# Altium PCB ScanQR_ESP32_pcb.PcbDoc
Units mil, origin at the board's own origin, x right, y up, seen from the top; angles counter-clockwise.
Board outline 2015 x 2315 mil, 2 copper layers (Top Layer, Bottom Layer); 14 components, 14 nets, 45 pads, 0 vias.
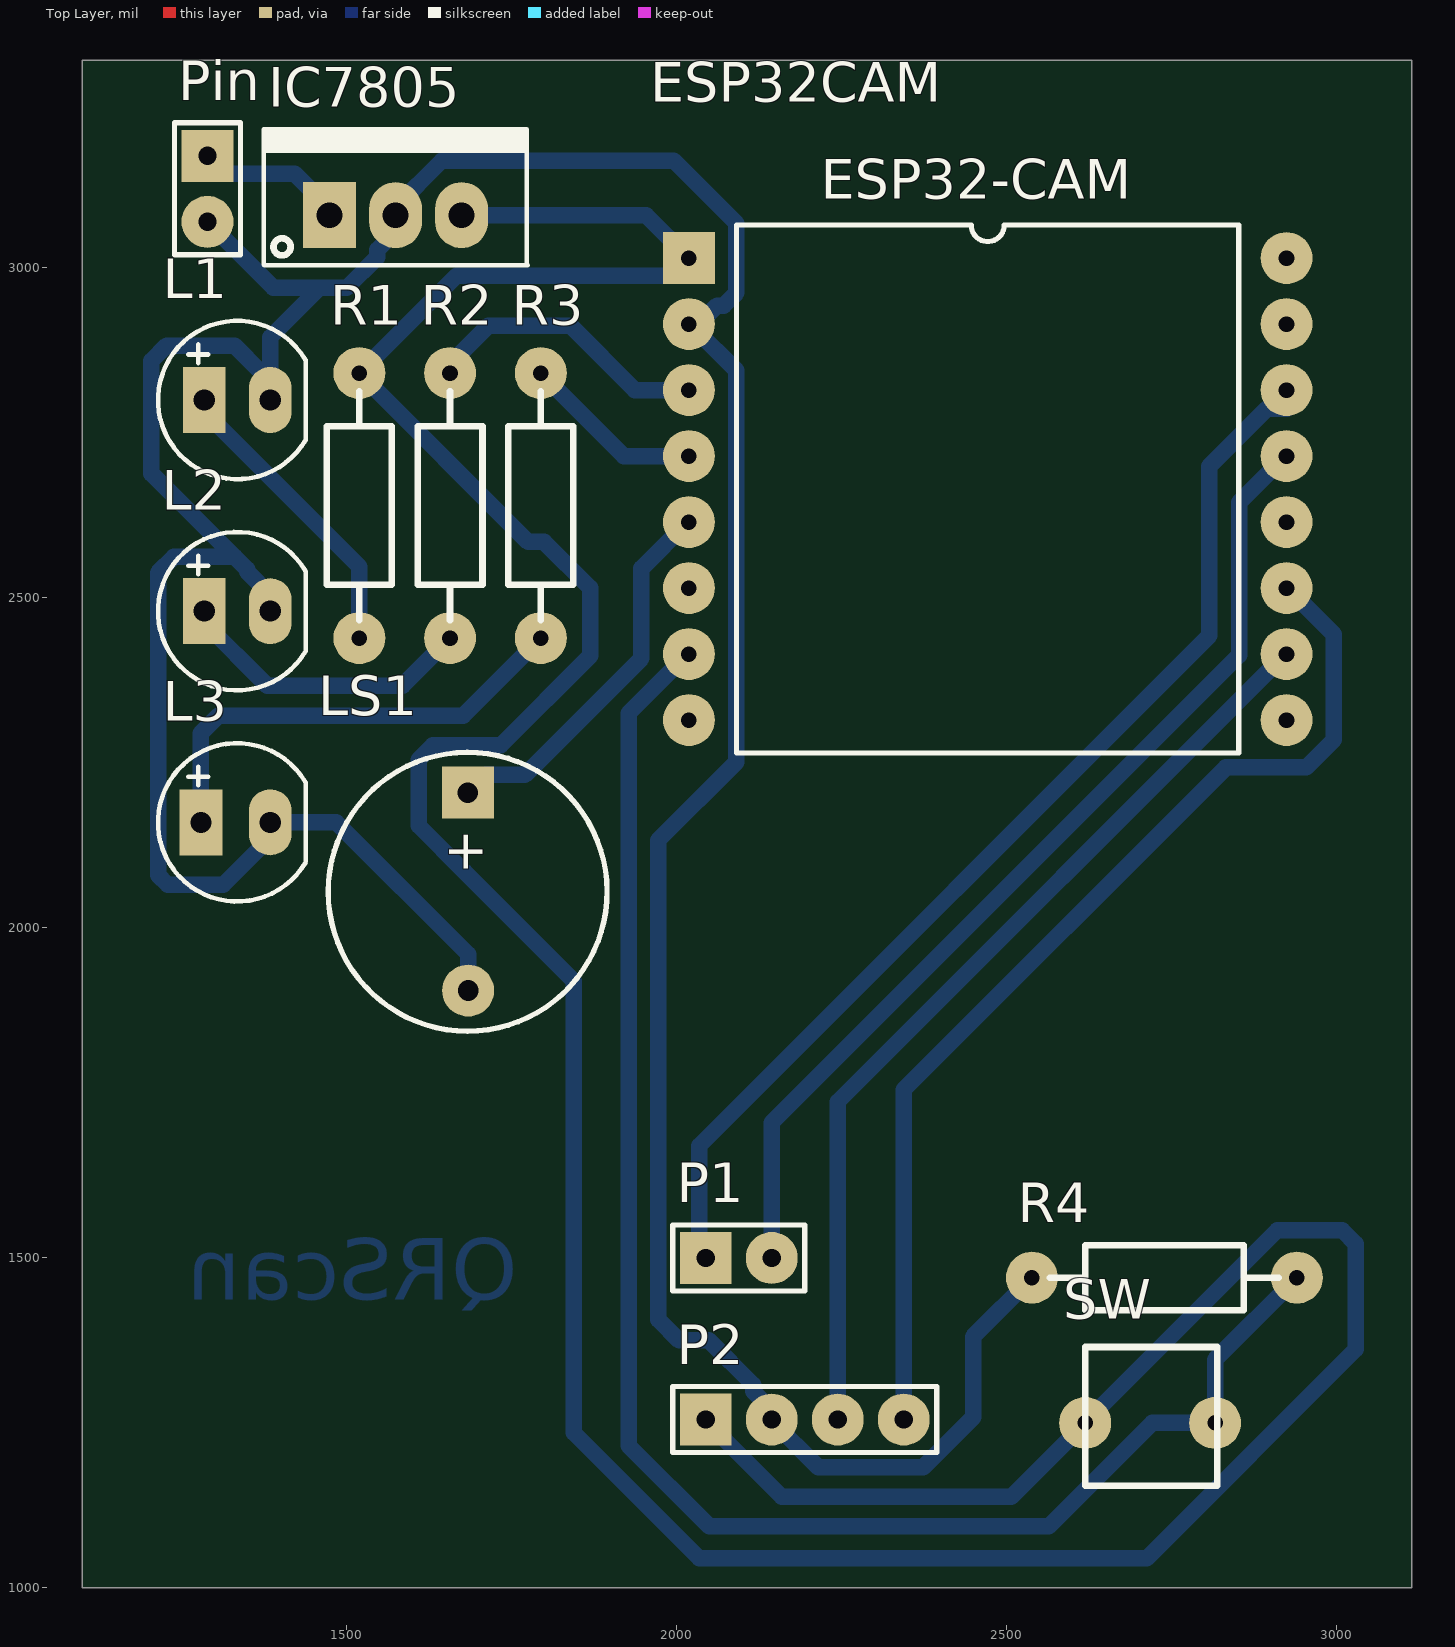
[diagram p0: Top Layer view]
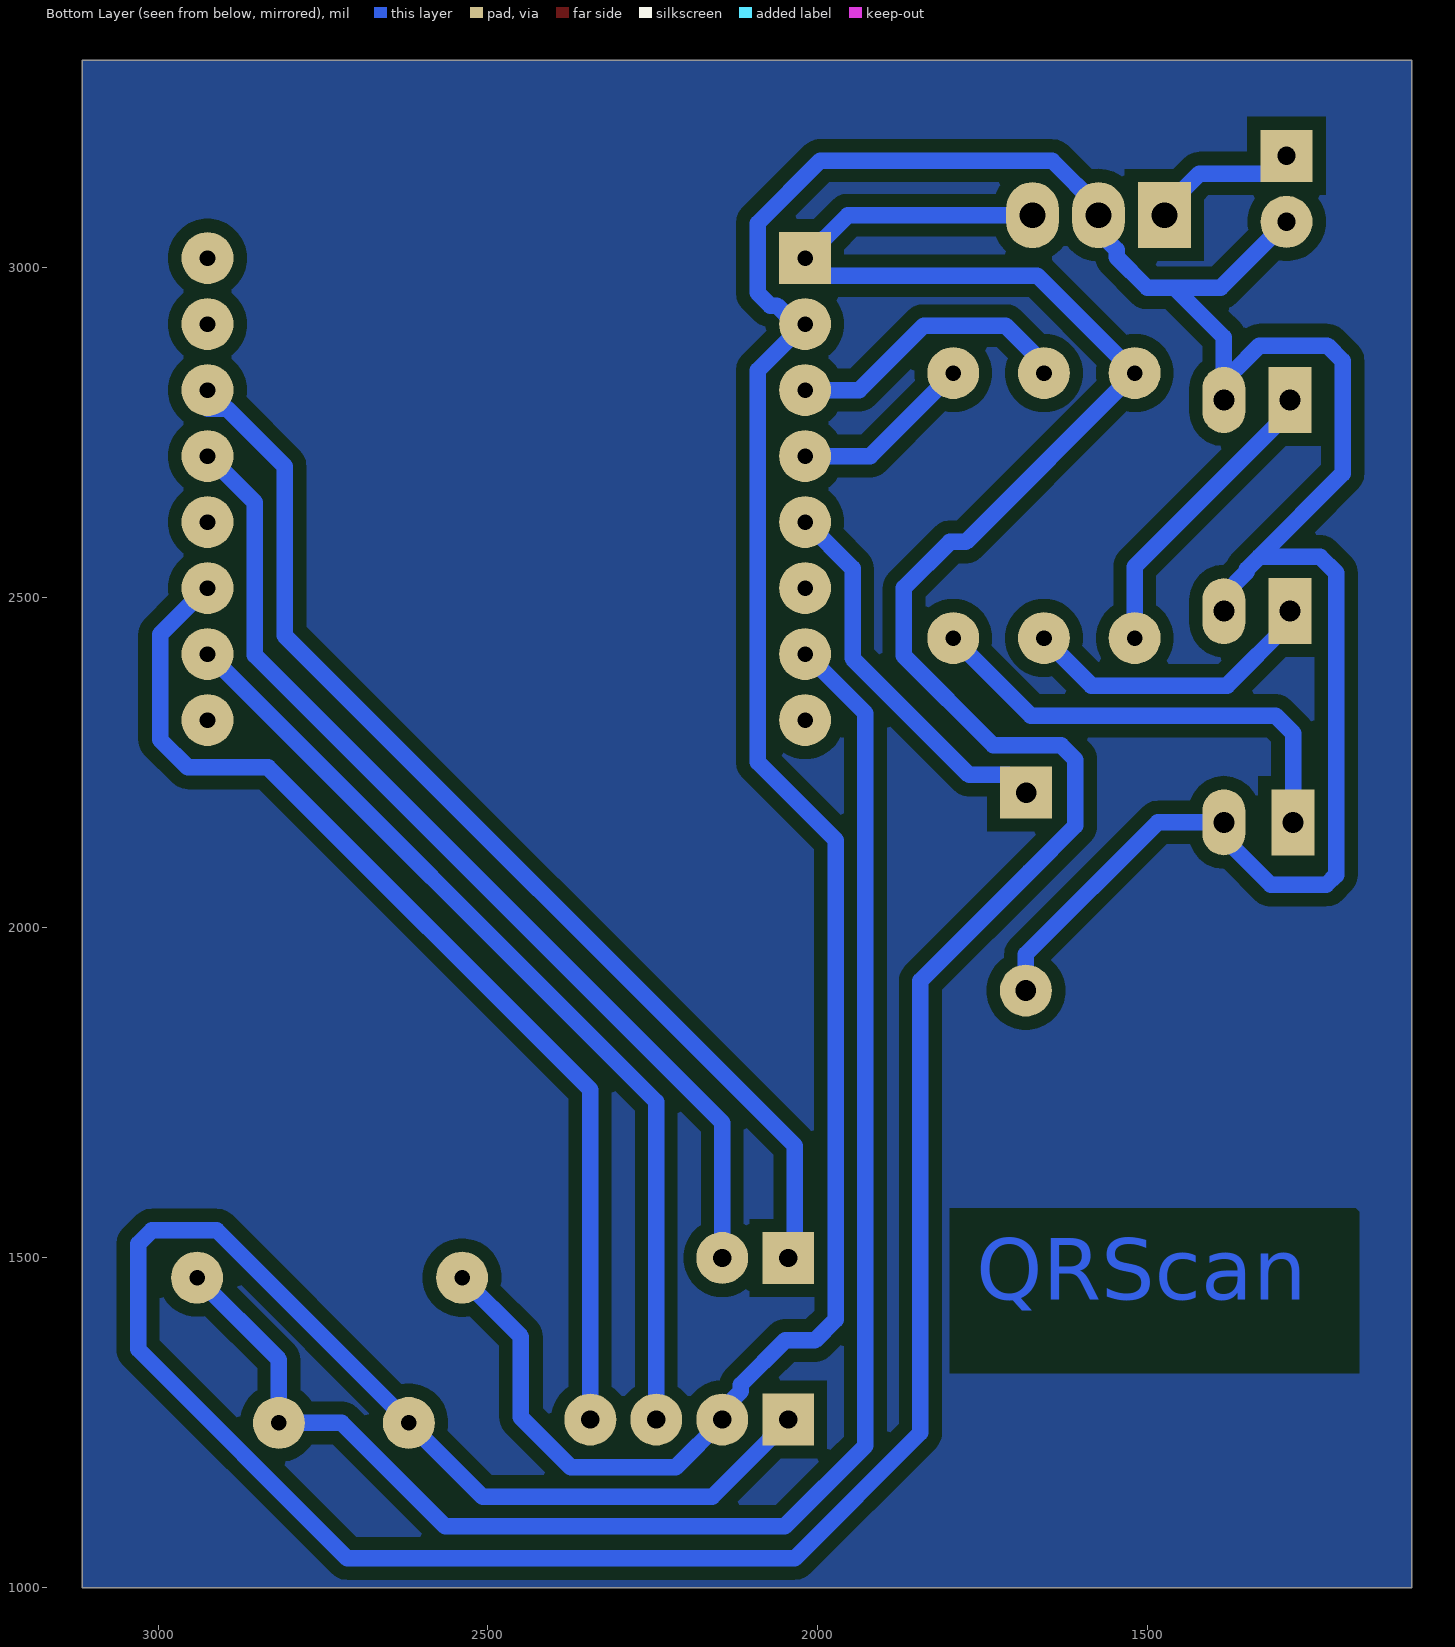
[diagram p1: Bottom Layer view, seen from below]
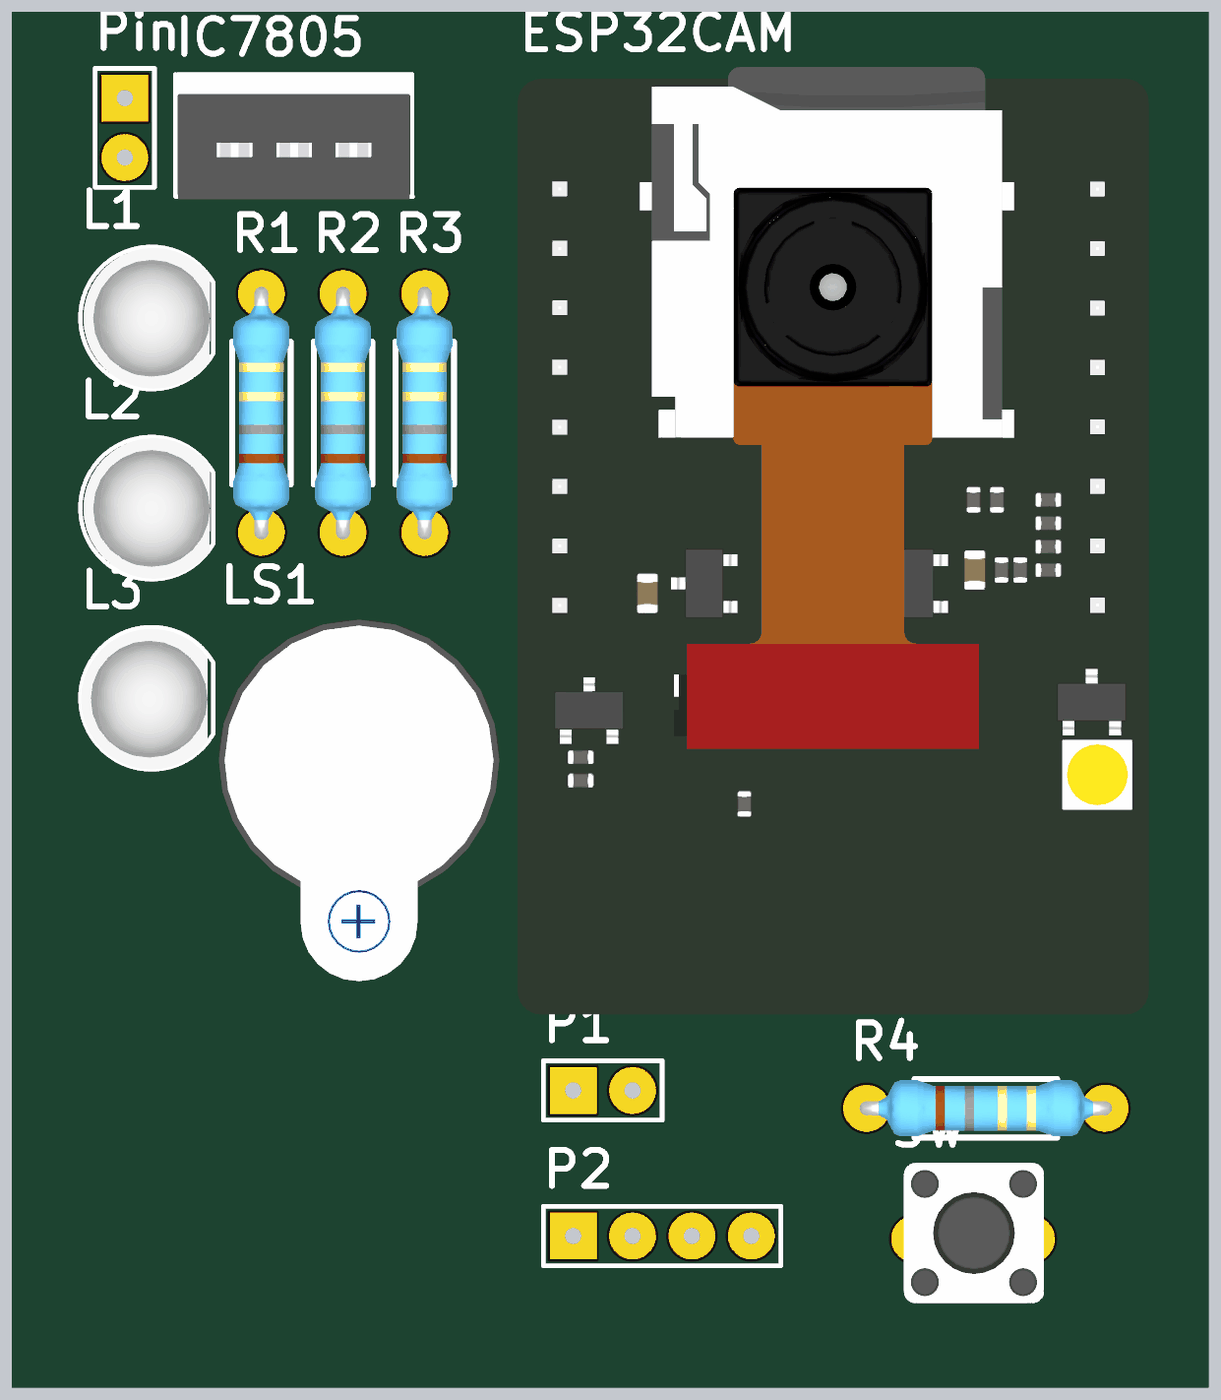
[diagram p2: 3D render of the assembled board from above, using the file's embedded part models]

## Layer stack, top to bottom
Top Solder: solder mask 0.4, Solder Resist, Dk 3.5
Top Layer: signal copper 1.4
Dielectric 1: dielectric 12.6, FR-4, Dk 4.8
Bottom Layer: signal copper 1.4
Bottom Solder: solder mask 0.4, Solder Resist, Dk 3.5

## Board outline
1100,1000 3115,1000 3115,3315 1100,3315

## Design rules (kind name [scope] priority, off if disabled: settings)
Clearance [All] p1: gap=20 ignorepadtopadclearanceinfootprint=FALSE
PolygonConnect [All] p1: connectstyle=Relief reliefconductorwidth=10 reliefentries=4 polygonreliefangle="90 Angle" airgapwidth=10
RoutingLayers [All] p1: top layer_v5=FALSE bottom layer_v5=TRUE
RoutingVias [All] p1: holewidth=28 width=50 viastyle="Through Hole" minholewidth=28 minwidth=50 maxholewidth=28 maxwidth=50
SolderMaskExpansion [All] p1: expansion=4 istentingtop=FALSE
Width [All] p1: maxlimit=30 minlimit=10 preferedwidth=25 toplayer_maxwidth=10 toplayer_prefwidth=10 bottomlayer_minwidth=20 minimp=50.000000 maximp=50.000000 favimp=50.000000
29 further rules are at their usual default settings.

## Classes and differential pairs
component class ScanQR_ESP32_sch: ESP32CAM IC7805 L1 L2 L3 LS1 P1 P2 Pin R2 R3 R4 SW

## Components (designator, comment, footprint, x,y, rotation, side; value= is the part's Value field where it differs from the comment)
ESP32CAM "ESP32-CAM" ESP32-CAM 2019.49,3015 r0 top
IC7805 "LM78xx" TO220-123 1475,3080 r0 top
L1 "LED 5mm" LED-5MM-RED 1285,2800 r0 top
L2 "LED 5mm" LED-5MM-RED 1285,2480 r0 top
L3 "LED 5mm" LED-5MM-Green 1285,2160 r0 top
LS1 "Coi Chip Speaker" "Coi Chip Speacker" 1684.5,2205 r270 top
P1 "Header 2x1" HDR1X2 2045,1500 r0 top
P2 "Header 4P" HDR1X4 2045,1255 r0 top
Pin "Header 2x1" HDR1X2 1290,3170 r270 top
R1 "0.11R" "tro vach 1/4w" 1520,2640 r270 top
R2 "0.11R" "tro vach 1/4w" 1657.5,2640 r270 top
R3 "0.11R" "tro vach 1/4w" 1795,2640 r270 top
R4 "0.11R" "tro vach 1/4w" 2740,1470 r180 top
SW "Switch 2pins 6x6x5" "Switch 2pins 6x6x5" 2620,1250 r0 top

## Footprints (in the part's own frame and the unit in brackets; to place one, negate y for a bottom-side part, rotate by r counter-clockwise, add the part's x,y. Pads: shape width x height; smd on the part's side, far side on the other; paste and mask are expansions set on the pad)
"Coi Chip Speacker" [mm]
  rect 2x2 hole 0.8: 1(0,0)
  round 2 hole 0.8: 2(7.62,0.013)
  silkscreen extent -1.55,-5.38 9.18,5.36, body extent -2.22,-6 13.24,6, height 4.5
ESP32-CAM [mm]
  rect 2x2 hole 0.6: 1(0,0)
  round 2 hole 0.6: 2(0,-2.54) 3(0,-5.08) 4(0,-7.62) 5(0,-10.16) 6(0,-12.7) 7(0,-15.24) 8(0,-17.78) 9(23,-17.78) 10(23,-15.24) 11(23,-12.7) 12(23,-10.16) 13(23,-7.62) 14(23,-5.08) 15(23,-2.54) 16(23,0)
  silkscreen extent 1.83,-19.05 21.17,1.27, body extent -1.73,-35.24 25.27,5.26, height 15.07
HDR1X2 [mm] "Connector; Header; 2 Position"
  rect 2x2 hole 0.7: 1(0,0)
  round 2 hole 0.7: 2(2.54,0)
  silkscreen extent -1.27,-1.27 3.81,1.27, body extent -1.27,-1.27 3.81,1.27, height 7
HDR1X4 [mm] "Connector; Header; 4 Position"
  rect 2x2 hole 0.7: 1(0,0)
  round 2 hole 0.7: 2(2.54,0) 3(5.08,0) 4(7.62,0)
  silkscreen extent -1.27,-1.27 8.89,1.27, body extent -1.27,-1.27 8.89,1.27, height 7
LED-5MM-Green [mil] "LED 2 PIN, 5 ly , Only colour,pin to pin 100mil"
  rect 65x100 hole 32: 1(-5,0)
  oval 65x100 hole 32: 2(100,0)
  silkscreen extent -70,-120 154,120, body extent -69,-120 145,117, height 339
LED-5MM-RED [mil] "LED 2 PIN, 5 ly , Only colour,pin to pin 100mil"
  rect 65x100 hole 32: 1(0,0)
  oval 65x100 hole 32: 2(100,0)
  silkscreen extent -70,-120 154,120, body extent -65,-119 149,118, height 339
"Switch 2pins 6x6x5" [mm]
  round 2 hole 0.6: 1(0,0) 2(5,0)
  silkscreen extent 0,-2.41 5.08,2.92, body extent -0.46,-2.75 5.54,3.25, height 8
TO220-123 [mil] "TO-220 - 1-2-3"
  rect 80x100 hole 39: 1(0,0)
  oval 80x100 hole 39: 2(100,0) 3(200,0)
  silkscreen extent -100,-76 300,130, body extent -95,-80 295,97, height 323
"tro vach 1/4w" [mm]
  round 2 hole 0.6: 1(-5.1,0) 2(5.1,0)
  silkscreen extent -4.39,-1.25 4.42,1.25, body extent -5.38,-1.2 5.38,1.2, height 2.41

## Part data
IC7805: "Positive Voltage Regulator", ComponentLink1Description="Manufacturer Link", ComponentLink1URL=http://www.st.com/, ComponentLink2Description=Datasheet, ComponentLink2URL=http://www.st.com/stonline/products/literature/ds/2146/l78m05c.pdf, DatasheetVersion=Apr-1994, LatestRevisionDate=17-Jul-2002, LatestRevisionNote="Re-released for DXP Platform.", Note="Tab is connected to pin 3 (GND).", PackageDescription="TO, Thru-Hole, Vertical, Heatsink Mounted; 3 In-Line Leads; Pitch 2.54 mm; Pin sequence 1, 3, 2", PackageReference=ISOWATT220AB, PackageVersion=Jul-1998, Published=24-Aug-2001, Publisher="Altium Limited"
L1 L2: library part "LED 5mm Do", "Cắm", Chung_Loai=Cắm, Don_Vi=Con, Ma_Hang=MH008967, Ten_Linh_Kien="Led 5MM Phủ Đỏ (1000c)"
L3: library part "LED 5mm Xanh La", "Cắm", Chung_Loai=Cắm, Don_Vi=Con, Ma_Hang=MH008969, Ten_Linh_Kien="LED 5MM Phủ Xanh (1000c)"
LS1: "Còi chip"
P1 Pin: "Header, 2-Pin, pitch 2.54mm", Solder=WAVE
P2: library part "Header 4x1", "Header, 4 Pin Pitch 2.54mm", MPN=S1012EC-40-ND, CompanyID=VT-00125, Solder=WAVE
R1 R2 R3 R4: library part "Tro Vach 1/4W 5% 0.11R", "Cắm", Chung_Loai=Cắm, Don_Vi=Con, Ma_Hang=MH005220, So_Chan=2, Ten_Linh_Kien="Trở Vạch 1/4w 5% 0.11R"

## Nets (pads, with @x,y where several pads share a name; then routed paths per layer and width w, separated by ;. In a path a pad name is that pad's centre, name@x,y a point inside that pad or via, vN(x,y) a via of type N, cw(c..) or ccw(c..) an arc to the next point about the centre after c; other vN are vias at no path point)
5V: ESP32CAM.1 IC7805.3 P2.1 R1.1 SW.1 | length 5738
  Bottom Layer w25: IC7805.3 1954.49,3080 ESP32CAM.1 1992.62,2988.13 1667.34,2988.13 R1.1 1775.79,2585 1800,2585 1869.64,2515.36 1869.64,2412.22 1734.3,2276.87 1631.67,2276.87 1610,2255.2 1610,2154.8 1679.8,2085 1845,1919.8 1845,1235 2035,1045 2713.49,1045 3030,1361.51 3030,1521.21 3009.34,1541.87 2911.02,1541.87 2620,1250.85 SW.1 2508.13,1138.13 2160.23,1138.13 2073.13,1225.23 2073.13,1226.87 P2.1
G0: ESP32CAM.14 P1.1 | length 1745
  Bottom Layer w25: P1.1 2035,1510 2035,1670 2808.13,2443.13 2808.13,2699.77 2895.23,2786.87 2896.87,2786.87 ; 2896.87,2786.87 2925,2786.87 ESP32CAM.14 2896.87,2786.87
G2: ESP32CAM.7 R4.1 SW.2 | length 2514
  Bottom Layer w25: ESP32CAM.7 2017.85,2415 1928.13,2325.28 1928.13,1215.51 2050.51,1093.13 2564.77,1093.13 2721.64,1250 SW.2 2816.85,1346.06 R4.1
G12: ESP32CAM.3 R2.1 | length 440.2
  Bottom Layer w25: R2.1 1657.5,2854.5 1715.66,2912.66 1839.81,2912.66 1937.47,2815 ESP32CAM.3
G13: ESP32CAM.4 R3.1 | length 276.6
  Bottom Layer w25: R3.1 1920.79,2715 ESP32CAM.4
G15: ESP32CAM.5 LS1.1 | length 587.2
  Bottom Layer w25: LS1.1@1682.74,2203.24 1711.37,2231.87 1771.08,2231.87 1906.55,2367.34 1947.62,2408.41 1947.62,2544.77 2017.85,2615 ESP32CAM.5
GND: ESP32CAM.2 IC7805.2 L1.2 L2.2 L3.2 LS1.2 P2.2 Pin.2 R4.2 | length 5743.9
  Bottom Layer w25: Pin.2 1390,2970 1460,2970 ; L2.2 1385,2505 1350,2540 1350,2543.46 1330.96,2562.5 ; L1.2 L1.2@1385,2828.32 ; LS1.2 1685,1960 1485,2160 L3.2 1385,2136.54 1313.82,2065.36 1229.64,2065.36 1215,2080 1215,2538.46 1239.04,2562.5 1330.96,2562.5 ; ESP32CAM.2 2021.13,2915 2027.58,2908.55 2091.36,2844.77 2091.36,2251.36 1973.13,2133.13 1973.13,1406.51 2004.64,1375 2049.7,1375 2116.87,1307.83 2116.87,1297.67 2145,1269.54 P2.2 2145,1253.36 2215.23,1183.13 2374.77,1183.13 2450,1258.36 2450,1380.79 R4.2 ; ESP32CAM.2@2034.03,2915 2062.16,2943.13 2072.32,2943.13 2091.36,2962.17 2091.36,3067.83 1996.69,3162.5 1644.97,3162.5 1575,3092.53 IC7805.2 1575,3055.12 1547.5,3027.62 1547.5,3016.54 1500.96,2970 1460,2970 ; 1330.96,2562.5 1205,2688.46 1205,2859.59 1227.91,2882.5 1330.96,2882.5 1350,2863.46 1350,2863.32 L1.2@1385,2828.32 ; L1.2@1385,2828.32 1385,2895 1460,2970
GND0: ESP32CAM.13 P1.2 | length 1539
  Bottom Layer w25: P1.2 2145,1705 2853.13,2413.13 2853.13,2644.77 2923.36,2715 ESP32CAM.13
in+: IC7805.1 Pin.1 | length 228.1
  Bottom Layer w25: Pin.1 1316.87,3143.13 1421.87,3143.13 1475,3090 IC7805.1
NetL1_1: L1.1 R1.2 | length 458.1
  Bottom Layer w25: L1.1 1285,2782.5 1520,2547.5 R1.2
NetL2_1: L2.1 R2.2 | length 459.2
  Bottom Layer w25: L2.1 1285,2462.5 1380.16,2367.34 1585.63,2367.34 R2.2
NetL3_1: L3.1 R3.2 | length 709.9
  Bottom Layer w25: L3.1 1280,2295.36 1306.51,2321.87 1677.66,2321.87 R3.2
RX: ESP32CAM.10 P2.3 | length 1442.6
  Bottom Layer w25: P2.3 2245,1736.64 2923.36,2415 ESP32CAM.10
TX: ESP32CAM.11 P2.4 | length 1632
  Bottom Layer w25: P2.4 2345,1755 2833.13,2243.13 2954.77,2243.13 2996.87,2285.23 2996.87,2444.77 2926.64,2515 ESP32CAM.11
pads on no net: ESP32CAM.6 ESP32CAM.8 ESP32CAM.9 ESP32CAM.12 ESP32CAM.15 ESP32CAM.16

## Polygon pours and split planes (outlines as drawn)
no net on Bottom Layer "NONET_L02_P000" (solid, pour order 0): 1100,1000 1100,3315 3115,3315 3115,1000

## Other copper
Bottom Layer:
  pour cut-out: 1800,1575 1800,1325 1180,1325 1180,1570 1185,1575
  text "QRScan" at 1760,1405.47 h160

## Text inside footprints (layer, text, board x,y; h text height)
LS1: Top Overlay "+" at 1656.5,2149.5 h60 r270